# Allegro board Solar BLE Sensor Layout.brd
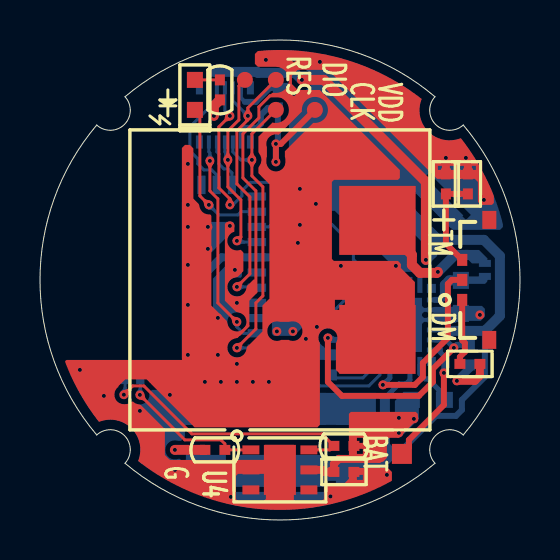
[diagram p0: board, top side]
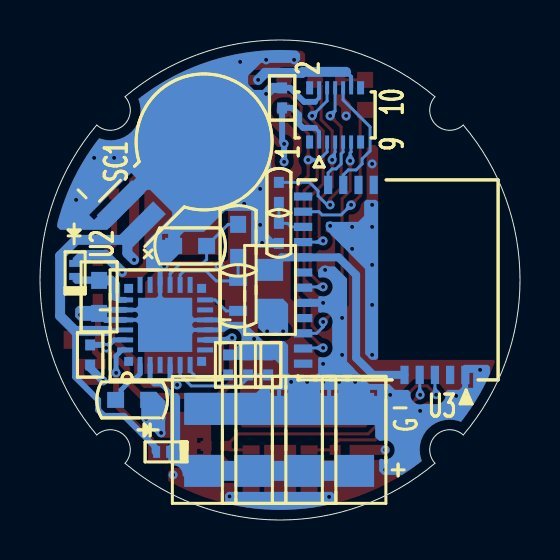
[diagram p1: board, bottom side, seen from below]

Outline 24 x 24 mm; copper layers: TOP, L2, L3, BOTTOM. Coordinates in mm from the lower left corner of the outline.
Outline path: 2.84,4.25 arc(0,12) 2.84,19.75 arc(4.22,19.78) 4.25,21.16 arc(12,24) 19.75,21.16 arc(19.78,19.78) 21.16,19.75 arc(24,12) 21.16,4.25 arc(19.78,4.22) 19.75,2.84 arc(12,0) 4.25,2.84 arc(4.22,4.22) 2.84,4.25

## Placement (name value [footprint] x y rotation side)
C1  10 uF  [CHIP_X1608_2_2]  21.04 11.16 270 bottom
C2  100 uF  [CHIP_X3216_2_1]  15.79 4.01 90 bottom
C3  100 uF  [CHIP_X3216_2_1]  13.29 4.01 90 bottom
C4  100 uF  [CHIP_X3216_2_1]  10.79 4.01 90 bottom
C5  100 uF  [CHIP_X3216_2_1]  8.29 4.01 90 bottom
C6  1.0 uF  [CHIP_X1005_2_2]  21.49 8.26 270 bottom
C7  2.2 nF  [CHIP_X1005_2_2]  12.59 7.76 90 bottom
C8  220 pF  [CHIP_X1005_2_2]  14.59 7.76 90 bottom
C9  220 pF  [CHIP_X1005_2_2]  21.49 7.81 0 top
C10  0.1 uF  [CHIP_X1005_2_2]  15.19 2.41 0 top
C11  0.1 uF  [CHIP_X1005_2_2]  11.89 21.11 90 bottom
C12  0.33 uF  [CHIP_X1005_2_2]  21.39 16.81 90 top
C13  0.1 uF  [CHIP_X1005_2_2]  20.29 16.81 90 top
C14  470 pF  [CHIP_X1005_2_2]  13.59 7.76 90 bottom
CN1  CON10A  [FLT_CONS_10_7PA]  9.24 20.26 180 bottom
D1  1SS417  [FLT_D0806_2_1PB]  22.24 12.51 90 bottom
D2  1SS417  [FLT_D0806_2_1PB]  17.84 3.41 0 bottom
L1  330 Ohm@100MHz  [CHIP_X2125_2_1]  12.49 11.51 270 bottom
LED1  GREEN  [CHIP_LED1608_2_4]  7.74 21.26 270 top
NOREF  -  []  11.99 12.01 0 top
R1  0  [CHIP_R1608_2_2]  19.39 6.01 180 bottom
R2  6.8M  [CHIP_R1608_2_5]  14.09 11.21 270 bottom
R3  5.6M  [CHIP_R1608_2_2]  14.09 13.96 270 bottom
R4  5.6M  [CHIP_R1608_2_2]  16.49 13.71 180 bottom
R5  330  [CHIP_R1005_2_2]  8.99 21.51 90 top
R6  10k  [CHIP_R1005_2_2]  12.05 16.38 270 bottom
R7  100k  [CHIP_R1005_2_2]  12.05 14.33 90 bottom
R8  10k  [CHIP_R1005_2_2]  8.74 3.51 180 top
R9  10k  [CHIP_R1005_2_2]  15.19 3.71 0 top
SC1  200 mF  [FLT_PC_2_8]  15.79 18.91 135 bottom
SW1  SSAJ120100  [FLT_SW_3_4PA]  22.39 12.01 90 top
TP1  1.0mm  [PINF_S1000S_1D]  18.09 3.31 0 top
TP2  1.0mm  [PINF_S1000S_1D]  5.69 3.51 0 top
TP3  0.8mm  [PINF_S0800C_1D]  13.74 20.51 0 top
TP4  0.8mm  [PINF_S0800C_1D]  11.79 22.01 0 top
TP5  0.8mm  [PINF_S0800C_1D]  11.79 20.51 0 top
TP6  0.8mm  [PINF_S0800C_1D]  10.24 22.01 0 top
TP7  1.0mm  [PINF_S1000S_1D]  5.69 3.51 180 bottom
U1  A453  [OTHER_XXX_2_2]  11.99 12.01 180 top
U2  S6AE103A  [QFN_X_24_6TH]  17.74 9.76 180 bottom
U3  CYBLE-022001-00  [OTHER_XXX_21_1]  6.09 12.01 90 bottom
U4  Si7020-A20-GM1  [SON_X_6_11TH]  11.99 2.51 270 top

## Library data of the parts
C1 = GRM188
C2-C5 = GRM31C
C6 C10-C13 = GRM155
C7-C9 C14 = GRM15X
CN1 = DF40C-10DP-0_4V_PA
D1 D2 = 1SS417_FSC_PB
L1 = BLM21PG
LED1 = LTST-C191KGKT
R1 = ERJ3GE
R2 = CRCW0603
R3 R4 = RC0603
R5-R9 = ERJ2G
SC1 = DCK-3R3E204T614-E
SW1 = SSAJ120100_PA
TP1 TP2 TP7 = PINF_S1000S_1D
TP3-TP6 = PINF_S0800C_1D: alternate symbols: (pinf_s0800c_2d)
U1 = A453
U2 = S6AE103A
U3 = CYBLE-022001-00
U4 = SI7020-A20-GM

## Footprints (pads in the part's own frame, mm; a bottom-side part is the same pattern mirrored in y, then rotated)
CHIP_LED1608_2_4
  rect 0.8x0.8 smd: 1(-0.75,0) 2(0.75,0)
CHIP_R1005_2_2
  rect 0.55x0.5 smd: 1(-0.5,0) 2(0.5,0)
CHIP_R1608_2_2
  rect 0.85x0.8 smd: 1(-0.825,0) 2(0.825,0)
CHIP_R1608_2_5
  rect 0.5x0.9 smd: 1(-0.75,0) 2(0.75,0)
CHIP_X1005_2_2
  rect 0.55x0.5 smd: 1(-0.5,0) 2(0.5,0)
CHIP_X1608_2_2
  rect 0.85x0.8 smd: 1(-0.825,0) 2(0.825,0)
CHIP_X2125_2_1
  rect 1.1x1.3 smd: 1(-1,0) 2(1,0)
CHIP_X3216_2_1
  rect 1.6x2 smd: 1(-1.55,0) 2(1.55,0)
FLT_CONS_10_7PA
  rect 0.2x0.66 smd: 1(-0.8,-1.355) 2(-0.8,1.355) 3(-0.4,-1.355) 4(-0.4,1.355) 5(0,-1.355) 6(0,1.355) 7(0.4,-1.355) 8(0.4,1.355) 9(0.8,-1.355) 10(0.8,1.355)
  rect 0.35x0.66 smd: E1(-1.275,-1.355) E2(-1.275,1.355) E3(1.275,-1.355) E4(1.275,1.355)
FLT_D0806_2_1PB
  rect 0.35x0.6 smd: 1(-0.425,0) 2(0.425,0)
FLT_PC_2_8
  rect 2.5x0.9 smd: 1(-5.15,-0.75) 2(-5.15,0.75)
FLT_SW_3_4PA
  rect 0.6x0.51 smd: 1(-1,1.285) 2(1,1.285) 3(0,1.285)
  rect 0.9x0.7 smd: MP1(-3,-0.07) MP2(3,-0.07)
OTHER_XXX_2_2
  rect 3.825x3.45 smd: 1(-4.878,-2.975) 2(-4.878,2.975)
OTHER_XXX_21_1
  rect 0.92x0.41 smd: 1(-4.75,-3.36) 2(-4.75,-2.6) 3(-4.75,-1.84) 4(-4.75,-1.08) 5(-4.75,-0.32) 18(4.75,3.5) 19(4.75,2.74) 20(4.75,1.98) 21(4.75,1.22)
  rect 0.41x0.92 smd: 6(-4.19,4.75) 7(-3.43,4.75) 8(-2.67,4.75) 9(-1.91,4.75) 10(-1.15,4.75) 11(-0.39,4.75) 12(0.37,4.75) 13(1.13,4.75) 14(1.89,4.75) 15(2.65,4.75) 16(3.41,4.75) 17(4.17,4.75)
PINF_S0800C_1D
  round 0.8 smd: 1(0,0)
PINF_S1000S_1D
  rect 1x1 smd: 1(0,0)
QFN_X_24_6TH
  rect 0.25x0.8 smd: 1(-1.25,-2) 2(-0.75,-2) 3(-0.25,-2) 4(0.25,-2) 5(0.75,-2) 6(1.25,-2) 13(1.25,2) 14(0.75,2) 15(0.25,2) 16(-0.25,2) 17(-0.75,2) 18(-1.25,2)
  rect 0.8x0.25 smd: 7(2,-1.25) 8(2,-0.75) 9(2,-0.25) 10(2,0.25) 11(2,0.75) 12(2,1.25) 19(-2,1.25) 20(-2,0.75) 21(-2,0.25) 22(-2,-0.25) 23(-2,-0.75) 24(-2,-1.25)
  rect 2.7x2.7 smd: 25(0,0)
  rect 0.45x0.45 smd: MP1(-1.825,-1.825) MP2(1.825,-1.825) MP3(1.825,1.825) MP4(-1.825,1.825)
SON_X_6_11TH
  rect 0.45x0.85 smd: 1(-1,-1.45) 2(0,-1.45) 3(1,-1.45) 4(1,1.45) 5(0,1.45) 6(-1,1.45)
  rect 2.5x1.6 smd: 7(0,0)

## Nets
GND_SIGNAL: C1.2 C2.2 C3.2 C4.2 C5.2 C6.2 C7.2 C8.2 C9.2 C10.2 C11.2 C12.2 C13.2 C14.2 CN1.2 R4.1 R7.1 SC1.2 TP2.1 TP7.1 U1.2 U2.9 U2.10 U2.16 U2.20 U2.21 U3.1 U3.10 U4.2 U4.7
VDD: C10.1 C11.1 CN1.1 L1.2 R1.2 R5.1 R8.2 R9.2 TP3.1 U4.5
VINT: C6.1 U2.8 U2.23
GPIO: CN1.9 U3.8
SCL: R9.1 U3.3 U4.6
SDA: R8.1 U3.4 U4.1
SWDCLK: CN1.3 TP5.1 U3.7
SWDIO: CN1.4 TP4.1 U3.11
UART_RX: CN1.7 U3.18
UART_TX: CN1.8 U3.19
USB_DET: CN1.6 R6.1
VSTORE2: CN1.10 D2.2 SC1.1 U2.22
XRES: CN1.5 TP6.1 U3.14
N03287: LED1.2 U3.16
N03298: R6.2 R7.2 U3.15
N03372: L1.1 U3.5 U3.13
N05511: D1.2 U1.1
N05549: C1.1 D1.1 U2.19
N05735: R2.2 U2.12
N05739: R2.1 R3.2 U2.14
N05754: R3.1 R4.2 U2.15
N06019: C8.1 U2.6
N06023: C7.1 C14.1 U2.5
N06027: SW1.3 U2.4
N06031: C9.1 SW1.1
N06288: C2.1 C3.1 C4.1 C5.1 D2.1 U2.2
N10908: TP1.1 U2.24
N014810: LED1.1 R5.2
N25629: R1.1 U2.1
N26419: C12.1 C13.1 SW1.2

Pads without a net: CN1 E1 E2 E3 E4; SW1 MP1 MP2; U2 3 7 11 13 17 18 25 MP1 MP2 MP3 MP4; U3 2 6 9 12 17 20 21; U4 3 4

## Via types
v1: diameter 0.45, hole 0.2, TOP to BOTTOM, 73 vias

## Routing (per net, layer and track width the routed paths; a pad name or vN(x,y) marks a point on that pad's centre or on a via; arc(x,y) is an arc through that point)
GND_SIGNAL: length 27.9
  TOP w0.15: v1(8.89,8.26) 8.89,8.71 9.49,9.31 9.99,9.31 10.39,9.71 ; v1(9.84,10.86) 10.24,10.86 10.79,11.41 10.79,16.46 10.14,17.11 10.14,19.31 10.94,20.11 10.94,20.66 11.49,21.21 12.24,21.21
  TOP w0.4: C9.2 21.99,7.21 21.74,6.96 v1(20.84,6.96)
  BOTTOM w0.2: CN1.2 10.04,21.11 10.24,20.91
  BOTTOM w0.25: U2.16 17.99,12.51 v1(17.79,12.71) ; U2.10 14.99,10.01 ; U2.9 14.94,9.51
  BOTTOM w0.3: U2.20 20.87,10.51 21.04,10.33 20.72,10.01 U2.21 ; C11.2 11.49,21.61 10.79,20.91 10.24,20.91
  BOTTOM w0.4: C6.2 21.49,7.61 v1(20.84,6.96) ; 2.73,6.27 2.74,6.26 ; U3.10 v1(9.84,10.86)
  BOTTOM w0.5: C11.2 12.39,21.61 v1(12.69,21.31)
  vias: v1(1.99,7.51) v1(3.19,6.21) v1(4.99,5.46) v1(6.49,6.26) v1(6.74,2.51) v1(7.39,17.81) v1(7.39,15.76) v1(7.39,14.66) v1(7.39,12.76) v1(7.39,10.76) v1(7.39,8.26) v1(8.24,6.91) v1(8.39,14.66) v1(8.39,13.56) v1(8.89,10.11) v1(9.04,6.91) v1(9.49,14.71) v1(9.54,1.16) v1(9.74,12.51) v1(9.84,7.81) v1(9.84,6.91) v1(10.64,6.91) v1(11.29,23.01) v1(11.44,6.91) v1(12.69,23.01) v1(12.89,13.86) v1(12.99,16.56) v1(12.99,14.76) v1(13.29,9.06) v1(13.79,15.81) v1(13.84,9.66) v1(13.99,22.91) v1(14.52,1.18) v1(15.04,12.71) v1(17.34,2.26) v1(20.29,18.11) v1(21.29,18.11) v1(21.99,10.26) v1(22.19,16.01)
VDD: length 16
  TOP w0.3: TP3.1 12.04,18.81 v1(11.79,18.81) v1(11.79,17.91)
  TOP w0.4: 16.99,3.11 16.94,3.05 14.94,3.05 14.69,2.81 C10.1 14.24,2.41 14.14,2.51 U4.5
  TOP w0.5: R8.2 v1(6.74,3.51) ; v1(8.69,20.21) 8.69,20.71 R5.1
  BOTTOM w0.2: 10.24,19.61 10.04,19.41 CN1.1
  BOTTOM w0.3: v1(11.79,17.91) v1(11.79,18.81) 11.89,18.91 C11.1 11.39,20.61 11.04,20.26 11.04,19.81 10.84,19.61 10.24,19.61
  vias: v1(11.84,9.43) v1(12.64,9.43) v1(17.94,5.11) v1(17.94,4.36) v1(18.69,5.06)
VINT: length 13.5
  TOP w0.3: v1(20.69,8.61) 19.64,7.56 19.64,6.91 18.94,6.21 15.09,6.21 14.39,6.91 v1(14.39,9.11)
  BOTTOM w0.25: v1(20.69,8.61) 20.29,9.01 U2.23
  BOTTOM w0.3: v1(20.69,8.61) 20.84,8.76 C6.1 ; U2.8 14.49,9.01 v1(14.39,9.11)
GPIO: length 11
  TOP w0.15: v1(9.84,9.91) 8.89,10.86 8.89,16.06 8.49,16.46 v1(8.49,17.96)
  BOTTOM w0.15: v1(9.84,9.91) 9.84,9.66 10.16,9.34 U3.8 ; v1(8.49,17.96) 8.49,18.36 8.44,18.41 CN1.9
SCL: length 14.3
  TOP w0.15: U4.6 14.49,3.51 R9.1 14.09,4.31 7.59,4.31 5.19,6.71 4.63,6.71 v1(4.19,6.27)
  BOTTOM w0.15: v1(4.19,6.27) 4.25,6.61 U3.3
SDA: length 7.9
  TOP w0.15: U4.1 R8.1 9.24,3.81 9.04,4.01 7.24,4.01 v1(4.99,6.26)
  BOTTOM w0.15: U3.4 5.01,6.61 v1(4.99,6.26)
SWDCLK: length 15.8
  TOP w0.15: v1(9.84,8.61) 10.79,9.56 10.79,10.86 11.14,11.21 11.14,16.66 10.59,17.21 v1(10.59,18.01) 10.59,19.31 TP5.1
  BOTTOM w0.15: U3.7 10.52,8.58 10.49,8.61 v1(9.84,8.61) ; v1(10.59,18.01) 10.04,18.01 9.64,18.41 CN1.3
SWDIO: length 14.4
  TOP w0.15: TP4.1 10.39,20.61 v1(10.39,20.21) 10.39,20.01 9.84,19.46 9.84,16.81 10.49,16.16 10.49,12.31 v1(9.84,11.66)
  BOTTOM w0.15: CN1.4 9.64,20.96 v1(10.39,20.21) ; v1(9.84,11.66) 10.59,11.66 10.63,11.62 U3.11
UART_RX: length 2.6
  BOTTOM w0.15: CN1.7 8.84,18.41 8.94,18.31 8.94,17.81 9.19,17.56 9.39,17.56 9.59,17.36 U3.18
UART_TX: length 6.2
  BOTTOM w0.15: U3.19 8.83,17.26 8.58,17.51 8.19,17.51 7.89,17.81 7.89,18.06 7.49,18.46 7.49,19.66 8.84,21.01 CN1.8
USB_DET: length 9.6
  TOP w0.15: v1(9.49,15.76) 9.49,16.06 8.94,16.61 8.94,19.66 v1(9.49,20.21)
  BOTTOM w0.15: v1(9.49,15.76) 9.64,15.76 10.09,16.21 10.09,16.46 10.52,16.88 R6.1 ; v1(9.49,20.21) 9.24,20.46 CN1.6
VSTORE2: length 38.4
  TOP w0.5: v1(13.09,22.01) 14.19,22.01 19.29,16.91 v1(19.29,13.01)
  BOTTOM w0.15: 20.59,9.46 20.54,9.51 U2.22
  BOTTOM w0.2: 8.69,22.41 8.44,22.16 CN1.10
  BOTTOM w0.3: 18.27,3.41 18.27,3.68 19.79,5.21 20.79,5.21 21.09,5.51 21.09,6.01 22.24,7.16 22.24,9.46
  BOTTOM w0.5: SC1.1 19.63,14.01 ; 19.63,14.01 22.19,14.01 22.99,13.21 22.99,10.21 22.24,9.46 20.59,9.46 ; 19.63,14.01 19.63,13.34 v1(19.29,13.01) ; v1(13.09,22.01) 12.74,22.36 10.89,22.36 10.84,22.41 8.69,22.41
XRES: length 10.7
  TOP w0.15: v1(9.84,13.96) 10.04,14.16 10.04,16.01 9.39,16.66 v1(9.39,18.01) 9.39,19.46 9.94,20.01 9.94,21.71 TP6.1
  BOTTOM w0.15: v1(9.39,18.01) 9.24,18.41 CN1.5 ; U3.14 10.19,13.9 v1(9.84,13.96)
N03287: length 7.7
  TOP w0.15: LED1.2 7.99,20.26 7.99,16.21 v1(8.44,15.76)
  BOTTOM w0.15: U3.16 10.05,15.42 9.89,15.26 8.94,15.26 v1(8.44,15.76)
N03298: length 2.3
  BOTTOM w0.15: U3.15 11.44,14.66 11.62,14.83 R7.2 R6.2
N03372: length 11.9
  BOTTOM w0.4: U3.5 7.34,7.26 8.19,8.11 8.19,12.26 9.07,13.14 U3.13 11.91,13.14 L1.1
N05511: length 6.3
  TOP w0.5: v1(19.89,12.41) 19.84,12.36 18.99,12.36 18.59,12.76 18.59,13.26 16.87,14.98
  BOTTOM w0.5: v1(19.89,12.41) 20.74,13.26 21.39,13.26
N05549: length 2
  BOTTOM w0.3: U2.19 20.04,11.01 20.24,11.21
  BOTTOM w0.5: 20.24,11.21 20.24,11.76 20.47,11.98 21.04,11.98
N05735: length 1.9
  BOTTOM w0.15: U2.12 15.24,11.01 14.69,10.46 R2.2
N05739: length 4.9
  BOTTOM w0.15: U2.14 16.99,12.26 16.79,12.46 15.69,12.46 15.19,11.96 R2.1 R3.2
N05754: length 5.4
  BOTTOM w0.15: R3.1 14.59,14.78 R4.2 15.67,13.03 15.89,12.81 16.99,12.81 17.49,12.3 U2.15
N06019: length 2.4
  BOTTOM w0.15: C8.1 14.79,7.11 16.14,7.11 16.49,7.46 U2.6
N06023: length 5.4
  BOTTOM w0.15: U2.5 16.99,7.26 16.44,6.71 13.99,6.71 13.59,7.11 C14.1 C7.1
N06027: length 9.3
  TOP w0.3: v1(17.14,6.76) 18.74,6.76 19.14,7.16 19.14,7.86 20.39,9.11 20.39,11.81 20.59,12.01 SW1.3
  BOTTOM w0.25: U2.4 17.49,7.11 v1(17.14,6.76)
N06031: length 3.4
  TOP w0.3: C9.1 20.99,8.16 21.24,8.41 21.24,8.86 21.11,8.99 SW1.1
N06288: length 12.2
  BOTTOM w0.25: 17.24,6.11 17.94,6.81 18.29,6.81 18.5,7.01 18.5,7.75 U2.2
  BOTTOM w0.5: 17.24,3.76 17.24,6.11
  BOTTOM w1: C2.1 C3.1 C4.1 C5.1
N10908: length 6.3
  TOP w0.3: TP1.1 18.44,3.66 18.44,4.01 20.19,5.76 v1(20.19,7.36)
  BOTTOM w0.25: U2.24 19.89,8.51 20.19,8.21 v1(20.19,7.36)
N014810: length 1.2
  TOP w0.15: LED1.1 R5.2
N25629: length 2.3
  BOTTOM w0.25: U2.1 18.99,7.31 19.24,7.06 19.39,7.06 19.94,6.51 19.94,6.28 R1.1
N26419: length 4.7
  TOP w0.3: C12.1 C13.1 20.29,13.82 SW1.2

## Copper pours and planes (outline as drawn; the poured copper is in the pictures)
GND_SIGNAL on TOP (solid shape): 10.89,23.45 11.04,23.46 11.34,23.48 11.65,23.5 11.96,23.5 12.26,23.5 12.57,23.49 12.88,23.47 13.03,23.45 13.09,23.45 13.24,23.43 13.53,23.4 13.83,23.35 14.12,23.3 14.41,23.24 14.7,23.17 14.99,23.1 15.28,23.02 15.56,22.93 15.84,22.83 16.12,22.73 16.4,22.62 16.67,22.5 16.94,22.38 17.21,22.25 17.47,22.11 17.73,21.96 17.99,21.81 18.24,21.65 18.49,21.49 18.73,21.32 18.97,21.14 19.08,21.05 19.06,21 19.03,20.89 19.01,20.79 18.99,20.68 18.98,20.57 18.97,20.46 18.98,20.35 18.99,20.25 19.01,20.14 19.04,20.03 19.08,19.93 19.12,19.83 19.17,19.73 19.23,19.64 19.3,19.55 19.37,19.47 19.44,19.39 19.53,19.32 19.61,19.26 19.71,19.2 19.8,19.14 19.9,19.1 20,19.06 20.11,19.03 20.21,19.01 20.32,18.99 20.43,18.98 20.54,18.99 20.65,18.99 20.77,19.01 20.88,19.04 20.99,19.07 21.04,19.09 21.13,18.97 21.32,18.73 21.49,18.48 21.66,18.23 21.82,17.97 21.97,17.71 22.12,17.44 22.26,17.17 22.39,16.9 22.52,16.62 22.64,16.34 22.69,16.2 22.69,15.86 22.59,15.76 22.04,15.76 21.89,15.91 21.89,16.91 21.74,17.06 19.85,17.06 19.4,17.51 21.79,17.51 21.79,17.71 21.59,17.71 21.59,17.51 21.19,17.51 21.19,17.71 20.99,17.71 20.99,17.51 20.69,17.51 20.69,17.71 20.49,17.71 20.49,17.51 20.09,17.51 20.09,17.71 19.89,17.71 19.89,17.51 19.4,17.51 14.4,22.51 12.89,22.51 12.59,22.21 12.59,21.8 12.89,21.5 13.99,21.5 17.99,17.5 17.99,17.11 17.89,17.01 14.69,17.01 14.59,16.91 14.59,13.06 14.69,12.96 17.89,12.96 18.04,12.81 18.04,12.6 18.74,11.9 18.74,7.36 14.94,7.36 14.79,7.51 14.79,8.85 14.82,8.89 14.84,8.95 14.86,9.01 14.87,9.07 14.87,9.13 14.86,9.19 14.85,9.25 14.82,9.31 14.79,9.37 14.75,9.42 14.71,9.46 14.66,9.5 14.61,9.53 14.55,9.56 14.49,9.57 14.43,9.58 14.36,9.58 14.3,9.57 14.24,9.56 14.18,9.53 14.13,9.5 14.08,9.46 14.04,9.42 14,9.37 13.97,9.31 13.94,9.26 13.93,9.19 13.92,9.13 13.92,9.07 13.93,9.01 13.95,8.95 13.97,8.89 13.99,8.85 13.99,6.74 13.99,4.76 13.87,4.63 7.73,4.63 5.33,7.03 4.26,7.03 3.92,6.69 3.92,6.65 3.85,6.59 3.81,6.55 3.78,6.49 3.75,6.44 3.73,6.38 3.72,6.32 3.72,6.26 3.72,6.2 3.74,6.14 3.76,6.08 3.78,6.02 3.82,5.97 3.86,5.93 3.9,5.89 3.96,5.85 4.01,5.83 4.07,5.81 4.13,5.79 4.19,5.79 4.25,5.79 4.31,5.79 4.37,5.81 4.42,5.82 4.48,5.85 4.53,5.88 4.59,5.92 4.62,5.92 4.64,5.92 4.7,5.88 4.75,5.85 4.8,5.82 4.86,5.8 5.04,5.75 6.24,4.55 6.24,3.26 6.49,3.01 8.45,3 11.19,3.01 11.24,3.06 11.24,3.76 12.69,3.76 12.69,1.01 12.74,0.96 14.09,0.96 14.19,1.06 14.19,1.76 14.29,1.86 15.24,1.86 15.39,2.01 16.14,2.01 16.14,2.26 15.84,2.26 15.84,2.01 15.39,2.01 15.44,2.06 15.44,2.6 17.13,2.6 17.39,2.61 17.59,2.41 17.59,1.96 17.46,1.89 17.19,1.74 16.91,1.61 16.63,1.48 16.35,1.36 16.07,1.25 15.78,1.15 15.49,1.05 15.19,0.96 14.9,0.88 14.6,0.8 14.3,0.74 14,0.68 13.7,0.63 13.39,0.59 13.09,0.56 12.78,0.53 12.48,0.51 12.17,0.51 11.87,0.51 11.56,0.51 11.25,0.53 10.95,0.55 10.64,0.58 10.34,0.62 10.04,0.67 9.73,0.73 9.43,0.79 9.14,0.87 8.84,0.95 8.55,1.03 8.26,1.13 7.97,1.23 7.68,1.34 7.4,1.46 7.12,1.59 6.84,1.72 6.57,1.86 6.3,2.01 6.04,2.17 5.98,2.21 9.79,2.21 9.79,1.06 9.89,0.96 11.19,0.96 11.29,1.06 11.29,2.21 11.19,2.31 9.89,2.31 9.79,2.21 5.98,2.21 5.78,2.33 5.52,2.5 5.27,2.67 5.03,2.86 4.9,2.95 4.92,3 4.96,3.11 4.98,3.21 5,3.32 5.01,3.43 5.01,3.54 5.01,3.65 4.99,3.76 4.97,3.87 4.94,3.97 4.91,4.08 4.86,4.18 4.81,4.27 4.75,4.37 4.69,4.45 4.61,4.54 4.54,4.61 4.45,4.69 4.36,4.75 4.27,4.81 4.17,4.86 4.07,4.91 3.97,4.94 3.87,4.97 3.76,5 3.65,5.01 3.54,5.02 3.43,5.01 3.32,5 3.21,4.99 3.11,4.96 3,4.93 2.95,4.91 2.85,5.03 2.67,5.28 2.49,5.54 2.31,5.8 2.15,6.07 1.99,6.34 1.84,6.61 1.7,6.89 1.56,7.17 1.43,7.46 1.31,7.75 1.26,7.9 1.26,7.94 1.27,7.96 1.29,7.98 1.32,8 1.36,8 7.09,8 7.09,18.61 7.24,18.76 7.49,18.76 7.67,18.58 7.67,16.07 7.94,15.8 7.99,15.61 8.02,15.55 8.05,15.49 8.12,15.41 8.16,15.37 8.21,15.34 8.26,15.32 8.32,15.3 8.38,15.28 8.44,15.28 8.5,15.27 8.53,15.26 8.55,15.24 8.56,15.22 8.57,15.18 8.57,10.72 9.34,9.95 9.39,9.76 9.41,9.71 9.44,9.65 9.48,9.6 9.52,9.56 9.56,9.52 9.62,9.49 9.67,9.46 9.73,9.44 9.79,9.43 9.85,9.43 9.91,9.43 9.97,9.45 10.03,9.47 10.08,9.49 10.13,9.53 10.18,9.56 10.22,9.61 10.31,9.99 10.3,10.06 10.27,10.12 10.24,10.17 10.2,10.22 10.15,10.27 10.1,10.31 10.05,10.34 9.99,10.36 9.8,10.41 9.24,10.96 9.24,14.81 9.34,14.91 9.59,14.91 9.72,14.78 9.72,14.41 9.66,14.39 9.61,14.37 9.56,14.33 9.51,14.3 9.47,14.25 9.44,14.2 9.41,14.15 9.39,14.09 9.37,14.03 9.37,13.97 9.37,13.91 9.38,13.85 9.4,13.79 9.42,13.74 9.45,13.69 9.49,13.64 9.53,13.6 9.58,13.56 9.63,13.53 9.69,13.5 9.76,13.49 9.82,13.48 9.89,13.48 9.96,13.49 10,13.51 10.04,13.51 10.17,13.38 10.17,12.44 9.89,12.16 9.71,12.11 9.65,12.09 9.59,12.06 9.54,12.02 9.5,11.98 9.46,11.93 9.42,11.88 9.4,11.82 9.38,11.76 9.37,11.7 9.37,11.64 9.37,11.58 9.39,11.52 9.41,11.46 9.44,11.4 9.48,11.35 9.52,11.31 9.57,11.27 9.62,11.24 9.68,11.21 9.73,11.19 9.8,11.18 9.86,11.18 9.92,11.19 9.98,11.2 10.04,11.22 10.09,11.25 10.14,11.29 10.19,11.33 10.23,11.38 10.27,11.44 10.3,11.51 10.35,11.7 10.65,12 10.66,12.01 10.69,12.02 10.71,12.03 10.74,12.03 10.77,12.01 10.79,12 10.81,11.97 10.82,11.94 10.82,11.93 10.82,11.34 10.47,10.99 10.47,9.69 9.89,9.11 9.71,9.06 9.65,9.04 9.59,9.01 9.54,8.97 9.49,8.93 9.45,8.88 9.42,8.82 9.4,8.77 9.38,8.7 9.37,8.64 9.37,8.58 9.38,8.52 9.39,8.46 9.42,8.4 9.45,8.34 9.48,8.29 9.53,8.25 9.58,8.21 9.63,8.18 9.69,8.15 9.75,8.14 9.81,8.13 9.87,8.13 9.94,8.14 10,8.15 10.06,8.18 10.11,8.21 10.16,8.25 10.2,8.29 10.24,8.34 10.35,8.65 11.11,9.41 11.37,9.41 11.38,9.35 11.39,9.29 11.41,9.23 11.44,9.18 11.47,9.13 11.52,9.09 11.56,9.05 11.62,9.01 11.67,8.99 11.73,8.97 11.79,8.96 11.85,8.95 11.91,8.96 11.97,8.97 12.03,8.99 12.06,9.01 12.43,9.01 12.46,8.99 12.52,8.97 12.58,8.96 12.64,8.95 12.7,8.96 12.76,8.97 12.82,8.99 12.87,9.01 12.93,9.05 12.97,9.09 13.01,9.13 13.05,9.18 13.08,9.23 13.1,9.29 13.11,9.35 13.12,9.41 13.12,9.47 13.11,9.53 13.1,9.59 13.08,9.65 13.05,9.7 13.02,9.75 12.98,9.8 12.93,9.84 12.88,9.87 12.83,9.89 12.77,9.91 12.71,9.93 12.65,9.93 12.59,9.93 12.53,9.93 12.48,9.92 12.43,9.91 12,9.91 11.96,9.92 11.9,9.93 11.84,9.93 11.78,9.93 11.72,9.91 11.66,9.9 11.61,9.87 11.56,9.84 11.51,9.8 11.47,9.75 11.44,9.7 11.41,9.65 11.39,9.59 11.38,9.53 11.37,9.47 11.37,9.41 11.11,9.41 11.12,9.42 11.12,10.51 15.24,10.51 15.24,11.01 14.74,11.01 14.74,10.51 11.12,10.51 11.12,10.72 11.47,11.07 11.47,16.79 10.92,17.34 10.92,17.62 11.02,17.79 11.04,17.85 11.06,17.91 11.07,17.97 11.07,18.04 11.06,18.1 11.04,18.16 11.02,18.22 10.92,18.39 10.92,18.82 11.32,18.82 11.32,18.75 11.33,18.69 11.34,18.64 11.34,18.16 11.33,18.12 11.32,18.05 11.32,17.99 11.32,17.96 11.32,17.92 11.32,17.86 11.33,17.8 11.35,17.74 11.37,17.69 11.4,17.63 11.44,17.59 11.48,17.54 11.53,17.51 11.59,17.48 11.64,17.45 11.7,17.44 11.76,17.43 11.83,17.43 11.89,17.44 11.95,17.45 12,17.48 12.06,17.51 12.1,17.54 12.15,17.59 12.19,17.64 12.22,17.69 12.24,17.74 12.26,17.8 12.27,17.86 12.27,17.92 12.27,17.96 12.27,17.99 12.27,18.05 12.26,18.12 12.24,18.17 12.24,18.44 13.66,19.86 13.72,19.85 13.8,19.86 13.87,19.87 13.94,19.88 14.01,19.91 14.07,19.94 14.13,19.98 14.19,20.03 14.24,20.08 14.28,20.14 14.32,20.2 14.35,20.26 14.37,20.33 14.39,20.4 14.39,20.47 14.39,20.55 14.39,20.62 14.37,20.69 14.34,20.76 14.31,20.82 14.27,20.88 14.23,20.94 14.18,20.99 14.12,21.04 14.06,21.07 14,21.11 13.93,21.13 13.86,21.15 13.79,21.15 13.71,21.16 13.64,21.15 13.57,21.13 13.5,21.11 13.44,21.08 13.38,21.04 13.32,21 13.27,20.95 13.22,20.89 13.18,20.83 13.15,20.77 13.12,20.7 13.11,20.63 13.1,20.56 13.09,20.48 13.1,20.43 11.93,19.26 11.88,19.27 11.81,19.28 11.75,19.28 11.69,19.27 11.63,19.25 11.57,19.23 11.52,19.19 11.47,19.15 11.43,19.11 11.39,19.06 11.36,19 11.34,18.94 11.32,18.88 11.32,18.82 10.92,18.82 10.92,19.17 11.63,19.88 11.69,19.86 11.76,19.86 11.83,19.86 11.9,19.86 11.97,19.88 12.03,19.9 12.1,19.93 12.16,19.96 12.21,20.01 12.26,20.06 12.31,20.11 12.35,20.17 12.38,20.23 12.41,20.29 12.43,20.36 12.44,20.43 12.45,20.5 12.44,20.57 12.43,20.63 12.42,20.69 12.35,20.84 12.31,20.9 12.27,20.95 12.22,21 12.17,21.04 12.11,21.07 12.05,21.1 11.92,21.14 11.86,21.15 11.8,21.16 11.5,21.16 11.48,21.18 11.48,21.2 11.48,21.21 11.6,21.36 11.8,21.35 11.88,21.36 11.95,21.37 12.02,21.39 12.08,21.42 12.15,21.46 12.21,21.5 12.26,21.55 12.31,21.6 12.35,21.66 12.38,21.73 12.41,21.79 12.43,21.86 12.44,21.93 12.45,22.01 12.44,22.08 12.43,22.15 12.41,22.22 12.38,22.29 12.35,22.35 12.3,22.41 12.26,22.46 12.2,22.51 12.14,22.55 12.08,22.59 12.01,22.62 11.94,22.64 11.88,22.65 11.82,22.66 10.89,22.66 10.74,22.81 10.74,23.31
GND_SIGNAL on BOTTOM (solid shape): 22.24,10.56 22.24,10.16 22.04,9.96 20.64,9.96 20.64,10.71 22.09,10.71
GND_SIGNAL on BOTTOM (solid shape): 7.79,15.91 7.79,15.21 8.09,14.91 9.64,14.91 9.69,14.86 9.69,14.51 9.6,14.42 9.51,14.34 9.43,14.24 7.74,12.56 7.74,8.31 7.44,8.01 7.19,8.01 7.09,8.1 7.09,14.5 7.09,15.91 7.19,16.01 7.69,16.01
GND_SIGNAL on BOTTOM (solid shape): 18.09,11.21 18.19,11.11 19.09,11.11 19.09,10.71 19.19,10.61 20.09,10.61 20.09,10.41 19.19,10.41 19.09,10.31 19.09,10.21 19.19,10.11 20.09,10.11 20.09,9.91 19.19,9.91 19.09,9.81 19.09,8.41 16.39,8.41 16.39,9.31 16.29,9.41 15.39,9.41 15.39,9.61 16.29,9.61 16.39,9.71 16.39,9.81 16.29,9.91 15.39,9.91 15.39,10.11 16.29,10.11 16.39,10.21 16.39,11.11 17.79,11.11 17.89,11.21 17.89,12.11 18.09,12.11
GND_SIGNAL on BOTTOM (solid shape): 11.16,23.47 11.31,23.48 11.63,23.49 11.94,23.5 12.25,23.5 12.56,23.49 12.88,23.47 13.03,23.45 13.24,23.43 13.53,23.4 13.83,23.35 14.12,23.3 14.41,23.24 14.7,23.17 14.99,23.1 15.28,23.02 15.56,22.93 15.84,22.83 16.12,22.73 16.4,22.62 16.67,22.5 16.94,22.38 17.21,22.25 17.47,22.11 17.73,21.96 17.99,21.81 18.24,21.65 18.49,21.49 18.73,21.32 18.97,21.14 19.08,21.05 19.06,21 19.03,20.89 19.01,20.79 18.99,20.68 18.98,20.57 18.97,20.46 18.98,20.35 18.99,20.25 19.01,20.14 19.04,20.03 19.08,19.93 19.12,19.83 19.17,19.74 19.23,19.64 19.3,19.55 19.37,19.47 19.44,19.39 19.53,19.32 19.61,19.26 19.7,19.2 19.8,19.14 19.9,19.1 20,19.06 20.11,19.03 20.21,19.01 20.32,18.99 20.43,18.98 20.54,18.99 20.64,18.99 20.72,19 20.81,19.02 20.9,19.04 21.04,19.09 21.13,18.97 21.31,18.73 21.49,18.49 21.65,18.24 21.81,17.98 21.96,17.72 22.11,17.46 22.25,17.19 22.38,16.92 22.51,16.65 22.63,16.37 22.74,16.09 22.84,15.81 22.94,15.53 23.02,15.24 23.11,14.95 23.14,14.79 23.14,14.66 22.99,14.51 20.64,14.51 18.64,16.51 18.49,16.51 17.39,15.41 17.39,15.21 18.69,13.91 18.69,12.51 18.59,12.41 17.94,12.41 16.99,13.35 16.99,14.01 17.89,14.01 17.89,14.31 17.59,14.31 17.59,14.01 16.99,14.01 16.99,14.21 16.79,14.41 15.79,14.41 14.74,15.46 13.44,15.46 13.44,13.81 13.24,13.61 11.89,13.61 11.84,13.66 11.84,14.06 12.34,14.06 12.59,14.31 12.59,17.11 19.19,17.11 21.29,15.01 21.54,15.26 19.44,17.36 19.19,17.11 12.59,17.11 12.59,17.41 12.44,17.56 12.44,21.36 12.59,21.5 13.3,21.5 13.59,21.8 13.59,22.21 12.95,22.86 11.14,22.86 10.99,23.01 10.99,23.31
GND_SIGNAL on BOTTOM (solid shape): 10.09,12.51 10.09,12.21 10.09,12.2 10.08,12.17 10.07,12.14 10.04,12.12 10.01,12.11 9.98,12.11 9.94,12.12 9.88,12.13 9.81,12.13 9.75,12.12 9.69,12.11 9.63,12.08 9.58,12.05 9.53,12.01 9.49,11.97 9.45,11.92 9.42,11.87 9.39,11.81 9.38,11.75 9.37,11.69 9.37,11.62 9.38,11.56 9.39,11.5 9.42,11.44 9.45,11.39 9.49,11.34 9.53,11.3 9.58,11.26 9.63,11.23 9.69,11.2 9.75,11.19 9.81,11.18 9.88,11.18 9.94,11.19 9.98,11.2 10.01,11.2 10.04,11.19 10.07,11.17 10.08,11.14 10.09,11.11 10.09,11.1 10.09,10.46 10.09,10.45 10.08,10.42 10.07,10.39 10.04,10.37 10.01,10.36 9.98,10.36 9.94,10.37 9.88,10.38 9.82,10.38 9.76,10.37 9.7,10.36 9.64,10.34 9.59,10.31 9.54,10.27 9.5,10.23 9.46,10.18 9.43,10.13 9.4,10.08 9.38,10.02 9.37,9.96 9.37,9.9 9.37,9.84 9.39,9.78 9.39,9.75 9.39,8.76 9.39,8.73 9.37,8.67 9.37,8.61 9.37,8.55 9.38,8.49 9.4,8.43 9.43,8.38 9.46,8.33 9.5,8.28 9.54,8.24 9.59,8.2 9.64,8.17 9.7,8.15 9.76,8.14 9.82,8.13 9.88,8.13 9.94,8.14 9.98,8.15 10.01,8.15 10.04,8.14 10.07,8.12 10.08,8.09 10.09,8.06 10.09,8.05 10.09,7.36 10.19,7.26 11.49,7.26 11.59,7.36 11.59,8.76 11.79,8.95 12.8,8.95 12.84,8.96 13.79,9.91 14.69,9.91 14.89,10.11 15.09,10.11 15.09,9.46 15.04,9.41 14.79,9.41 14.73,9.44 14.71,9.46 14.66,9.5 14.61,9.53 14.56,9.55 14.51,9.57 14.46,9.58 14.4,9.58 14.34,9.58 14.28,9.57 14.22,9.55 14.17,9.52 14.11,9.49 14.07,9.45 14.02,9.4 13.99,9.35 13.96,9.3 13.94,9.24 13.92,9.18 13.92,9.11 13.92,9.05 13.93,8.99 13.95,8.93 13.98,8.87 14.01,8.82 14.06,8.77 14.11,8.72 14.16,8.69 14.34,8.51 14.84,8.51 14.84,8.01 12.24,8.01 12.04,7.81 12.04,7.16 11.99,7.11 11.99,6.88 12.14,6.73 12.82,6.73 13.19,6.36 16.64,6.36 16.64,4.76 14.79,4.76 14.29,4.76 12.29,4.76 11.79,4.76 9.79,4.76 9.29,4.76 7.29,4.76 7.24,4.71 7.24,4.16 7.04,3.96 6.91,3.96 6.86,3.97 6.8,3.98 6.73,3.98 6.67,3.98 6.61,3.96 6.55,3.94 6.5,3.91 6.45,3.88 6.4,3.83 6.36,3.79 6.33,3.73 6.3,3.68 6.28,3.62 6.27,3.56 6.27,3.49 6.27,3.43 6.29,3.37 6.31,3.31 6.34,3.26 6.37,3.21 6.42,3.16 6.46,3.12 6.52,3.09 6.57,3.06 6.63,3.04 6.7,3.03 6.76,3.03 6.82,3.04 6.88,3.05 6.95,3.07 6.98,3.06 7,3.05 7.02,3.03 7.04,3.01 7.04,2.97 7.04,2.46 6.84,2.26 5.9,2.26 5.77,2.34 5.52,2.5 5.27,2.68 5.02,2.86 4.9,2.95 4.92,3 4.96,3.11 4.98,3.21 5,3.32 5.01,3.43 5.01,3.54 5.01,3.65 4.99,3.76 4.97,3.87 4.94,3.97 4.91,4.08 4.86,4.18 4.81,4.27 4.75,4.37 4.69,4.45 4.61,4.54 4.54,4.61 4.45,4.69 4.36,4.75 4.27,4.81 4.17,4.86 4.07,4.91 3.97,4.94 3.87,4.97 3.76,5 3.65,5.01 3.54,5.02 3.43,5.01 3.32,5 3.21,4.99 3.11,4.96 3,4.93 2.95,4.91 2.85,5.03 2.67,5.28 2.49,5.54 2.31,5.8 2.15,6.07 1.99,6.34 1.84,6.61 2.59,6.61 2.59,7.36 2.34,7.36 2.34,6.61 1.84,6.61 1.84,6.62 1.69,6.9 1.56,7.18 1.49,7.32 1.49,7.66 1.59,7.76 2.79,7.76 2.89,7.66 2.89,6.66 3.04,6.51 3.62,6.51 3.72,6.41 3.72,6.25 3.72,6.19 3.74,6.13 3.76,6.08 3.79,6.02 3.82,5.97 3.86,5.93 3.91,5.89 3.96,5.85 4.01,5.83 4.07,5.81 4.13,5.79 4.19,5.79 4.27,5.79 4.33,5.8 4.36,5.81 4.83,5.81 4.88,5.79 4.94,5.78 5,5.78 5.06,5.78 5.12,5.8 5.18,5.82 5.24,5.85 5.29,5.88 5.33,5.92 5.37,5.97 5.41,6.02 5.43,6.07 5.45,6.13 5.47,6.19 5.47,6.21 12.49,6.21 12.49,6.51 12.14,6.51 12.14,6.21 11.94,6.21 11.94,6.51 11.59,6.51 11.59,6.21 9.99,6.21 9.99,6.51 9.64,6.51 9.64,6.21 9.44,6.21 9.44,6.51 9.09,6.51 9.09,6.21 7.49,6.21 7.49,6.51 7.14,6.51 7.14,6.21 5.47,6.21 5.47,6.25 5.47,6.31 5.46,6.37 5.59,6.51 6.24,6.51 6.54,6.8 7.54,6.81 8.29,7.56 8.29,7.57 8.64,7.92 8.64,12.07 9.26,12.68 9.91,12.68
GND_SIGNAL on L3 (solid shape): 7.14,22.38 7.28,22.44 7.56,22.56 7.84,22.67 8.12,22.78 8.4,22.88 8.69,22.97 8.98,23.05 9.27,23.13 9.56,23.19 9.86,23.25 10.16,23.31 10.45,23.35 10.75,23.39 11.05,23.42 11.35,23.44 11.65,23.45 11.95,23.46 12.25,23.45 12.56,23.44 12.86,23.42 13.16,23.4 13.45,23.36 13.75,23.32 14.05,23.27 14.35,23.21 14.64,23.15 14.93,23.07 15.22,22.99 15.51,22.9 15.79,22.81 16.08,22.7 16.36,22.59 16.63,22.47 16.91,22.35 17.18,22.22 17.44,22.08 17.71,21.93 17.97,21.78 18.22,21.61 18.47,21.45 18.72,21.27 18.96,21.09 19.08,21 19.06,20.95 19.03,20.84 19.01,20.74 18.99,20.63 18.98,20.52 18.99,20.41 19,20.3 19.01,20.19 19.04,20.08 19.07,19.98 19.11,19.88 19.16,19.78 19.22,19.68 19.28,19.59 19.35,19.51 19.42,19.42 19.5,19.35 19.59,19.28 19.68,19.22 19.78,19.16 19.87,19.11 19.98,19.07 20.08,19.04 20.19,19.01 20.3,19 20.41,18.99 20.52,18.99 20.63,18.99 20.73,19.01 20.84,19.03 20.95,19.06 21,19.08 21.09,18.96 21.28,18.71 21.45,18.46 21.62,18.21 21.78,17.95 21.94,17.69 22.08,17.42 22.22,17.15 22.36,16.87 22.48,16.6 22.6,16.31 22.71,16.03 22.82,15.74 22.91,15.45 23,15.16 23.08,14.87 23.15,14.57 23.22,14.27 23.27,13.97 23.32,13.67 23.36,13.37 23.4,13.07 23.42,12.76 23.44,12.46 23.44,12.15 23.44,11.85 23.44,11.54 23.42,11.24 23.39,10.93 23.36,10.63 23.32,10.33 23.27,10.03 23.22,9.73 23.15,9.43 23.08,9.13 23,8.84 22.91,8.55 22.81,8.26 22.71,7.97 22.6,7.69 22.48,7.41 22.35,7.13 22.22,6.85 22.08,6.58 21.93,6.32 21.78,6.05 21.61,5.79 21.45,5.54 21.27,5.29 21.09,5.05 20.99,4.93 20.94,4.94 20.84,4.97 20.73,5 20.62,5.01 20.51,5.02 20.4,5.01 20.29,5 20.18,4.99 20.08,4.96 19.97,4.93 19.87,4.88 19.77,4.84 19.68,4.78 19.59,4.72 19.5,4.65 19.42,4.58 19.35,4.5 19.28,4.41 19.22,4.32 19.16,4.23 19.12,4.13 19.07,4.03 19.04,3.92 19.02,3.82 19,3.71 18.99,3.6 18.98,3.49 18.99,3.38 19,3.27 19.03,3.16 19.06,3.06 19.07,3.01 18.95,2.91 18.71,2.73 18.46,2.55 18.21,2.39 17.95,2.22 17.68,2.07 17.42,1.92 17.15,1.78 16.87,1.65 16.59,1.52 16.31,1.4 16.03,1.29 15.74,1.19 15.45,1.09 15.16,1 14.87,0.92 14.57,0.85 14.27,0.78 13.97,0.73 13.67,0.68 13.37,0.64 13.07,0.6 12.76,0.58 12.46,0.56 12.15,0.56 11.85,0.56 11.54,0.56 11.24,0.58 10.93,0.6 10.63,0.64 10.33,0.68 10.03,0.72 9.73,0.78 9.43,0.85 9.13,0.92 8.84,1 8.55,1.09 8.26,1.18 7.97,1.29 7.68,1.4 7.4,1.52 7.13,1.64 6.85,1.77 6.58,1.92 6.31,2.06 6.05,2.22 5.79,2.38 5.54,2.55 5.29,2.72 5.04,2.91 4.92,3 4.94,3.05 4.97,3.16 4.99,3.27 5.01,3.37 5.01,3.48 5.01,3.59 5,3.7 4.99,3.81 4.96,3.92 4.93,4.02 4.88,4.13 4.84,4.23 4.78,4.32 4.76,4.35 17.47,4.35 17.47,4.29 17.48,4.23 17.5,4.18 17.53,4.12 17.56,4.07 17.6,4.02 17.65,3.98 17.7,3.95 17.76,3.92 17.81,3.9 17.87,3.88 17.93,3.88 18,3.88 18.06,3.89 18.11,3.91 18.17,3.94 18.22,3.97 18.27,4.01 18.31,4.05 18.35,4.1 18.38,4.16 18.4,4.21 18.41,4.27 18.42,4.34 18.42,4.4 18.41,4.46 18.4,4.53 18.4,4.55 18.42,4.58 18.44,4.6 18.46,4.61 18.49,4.61 18.56,4.6 18.62,4.59 18.68,4.58 18.74,4.58 18.8,4.59 18.86,4.61 18.92,4.64 18.97,4.67 19.02,4.71 19.06,4.75 19.1,4.8 19.13,4.85 19.15,4.91 19.16,4.97 19.17,5.03 19.17,5.09 19.16,5.16 19.14,5.21 19.12,5.27 19.09,5.32 19.05,5.37 19.01,5.42 18.96,5.45 18.9,5.48 18.85,5.51 18.79,5.52 18.73,5.53 18.66,5.53 18.6,5.52 18.54,5.51 18.49,5.48 18.43,5.45 18.4,5.43 18.37,5.42 18.34,5.41 18.31,5.42 18.29,5.43 18.26,5.46 18.21,5.5 18.16,5.53 18.1,5.55 18.04,5.57 17.98,5.58 17.92,5.58 17.86,5.57 17.8,5.56 17.74,5.54 17.69,5.51 17.64,5.47 17.6,5.43 17.56,5.38 17.53,5.33 17.5,5.28 17.48,5.22 17.47,5.16 17.47,5.1 17.47,5.04 17.49,4.98 17.5,4.92 17.53,4.87 17.56,4.82 17.6,4.76 17.61,4.73 17.6,4.7 17.56,4.64 17.53,4.59 17.5,4.53 17.48,4.48 17.47,4.42 17.47,4.35 4.76,4.35 4.72,4.41 4.65,4.5 4.57,4.58 4.49,4.65 4.41,4.72 4.32,4.78 4.22,4.84 4.12,4.89 4.02,4.93 3.92,4.96 3.81,4.99 3.7,5 3.59,5.01 3.48,5.02 3.37,5.01 3.26,4.99 3.15,4.97 3.05,4.94 3,4.92 2.9,5.04 2.72,5.29 2.55,5.54 2.38,5.79 2.22,6.05 2.09,6.26 3.72,6.26 3.72,6.2 3.73,6.14 3.75,6.08 3.78,6.03 3.82,5.98 3.86,5.93 3.9,5.89 3.95,5.85 4.01,5.83 4.07,5.81 4.13,5.79 4.19,5.79 4.25,5.79 4.31,5.79 4.37,5.81 4.42,5.82 4.48,5.85 4.53,5.88 4.59,5.92 4.61,5.92 4.64,5.92 4.7,5.88 4.75,5.84 4.81,5.82 4.87,5.8 4.93,5.78 4.99,5.78 5.05,5.78 5.11,5.79 5.17,5.81 5.23,5.84 5.28,5.87 5.33,5.92 5.37,5.96 5.4,6.01 5.43,6.07 5.45,6.13 5.47,6.19 5.47,6.25 5.47,6.31 5.46,6.37 5.44,6.43 5.41,6.49 5.38,6.54 5.34,6.59 5.29,6.63 5.24,6.66 5.18,6.69 5.13,6.71 5.07,6.73 5,6.73 4.94,6.73 4.88,6.72 4.82,6.7 4.77,6.67 4.71,6.64 4.65,6.6 4.62,6.6 4.6,6.6 4.54,6.64 4.48,6.68 4.43,6.7 4.37,6.72 4.31,6.74 4.25,6.74 4.19,6.74 4.13,6.74 4.07,6.72 4.01,6.7 3.95,6.68 3.9,6.64 3.86,6.6 3.82,6.55 3.78,6.5 3.75,6.45 3.73,6.39 3.72,6.33 3.72,6.26 2.09,6.26 2.06,6.31 1.91,6.58 1.77,6.85 1.64,7.12 1.51,7.4 1.39,7.68 1.33,7.86 1.33,7.89 1.35,7.91 1.37,7.93 1.39,7.95 1.43,7.96 7.14,7.96 7.14,9.43 11.37,9.43 11.37,9.37 11.38,9.31 11.4,9.25 11.43,9.2 11.46,9.15 11.5,9.1 11.55,9.06 11.6,9.02 11.65,9 11.71,8.98 11.76,8.96 12.58,8.96 12.65,8.95 12.71,8.96 12.77,8.97 12.83,8.99 12.89,9.02 12.94,9.05 12.98,9.1 13.02,9.14 13.06,9.19 13.08,9.25 13.1,9.31 13.12,9.37 13.12,9.43 13.12,9.49 13.1,9.55 13.08,9.61 13.06,9.67 13.02,9.72 12.98,9.76 12.94,9.81 12.89,9.84 12.83,9.87 12.77,9.89 12.71,9.9 12.65,9.91 12.58,9.91 11.76,9.9 11.71,9.89 11.65,9.86 11.6,9.84 11.55,9.8 11.5,9.76 11.46,9.71 11.43,9.66 11.4,9.61 11.38,9.55 11.37,9.49 11.37,9.43 7.14,9.43
VDD on TOP (solid shape): 18.89,5.31 18.89,5.06 17.94,4.11 17.44,4.11 17.34,4.01 17.34,3.11 17.14,2.91 15.59,2.91 15.44,3.06 15.44,3.31 16.14,3.31 16.14,3.56 15.84,3.56 15.84,3.31 15.44,3.31 15.44,3.86 16.14,3.86 16.14,4.11 15.84,4.11 15.84,3.86 15.44,3.86 15.44,5.31 15.54,5.41 18.79,5.41
VDD on BOTTOM (solid shape): 13.09,9.61 12.69,9.21 11.69,9.21 11.59,9.31 11.59,10.81 11.84,11.06 13.09,11.06
VDD on BOTTOM (solid shape): 18.94,5.06 18.04,4.16 17.84,4.16 17.74,4.26 17.74,5.96 18.19,6.41 18.94,6.41
VDD on L2 (solid shape): 12.28,23.44 12.3,23.43 12.32,23.41 12.33,23.38 12.34,23.36 12.33,23.33 12.3,23.27 12.27,23.22 12.24,23.16 12.23,23.1 12.22,23.04 12.22,22.98 12.23,22.92 12.24,22.86 12.26,22.81 12.29,22.75 12.33,22.7 12.37,22.66 12.41,22.62 12.47,22.59 12.52,22.56 12.58,22.54 12.64,22.53 12.7,22.53 12.76,22.53 12.82,22.55 12.87,22.56 12.93,22.59 12.98,22.62 13.02,22.66 13.06,22.71 13.1,22.76 13.13,22.81 13.15,22.86 13.16,22.92 13.17,22.98 13.17,23.04 13.16,23.1 13.14,23.16 13.12,23.22 13.09,23.28 13.09,23.31 13.1,23.33 13.12,23.36 13.14,23.38 13.16,23.39 13.29,23.38 13.46,23.36 13.56,23.35 13.59,23.33 13.61,23.31 13.63,23.29 13.63,23.26 13.63,23.23 13.62,23.2 13.6,23.16 13.57,23.11 13.54,23.05 13.53,22.99 13.52,22.93 13.52,22.87 13.53,22.81 13.55,22.75 13.57,22.69 13.6,22.64 13.64,22.59 13.69,22.54 13.74,22.51 13.79,22.48 13.85,22.45 13.91,22.44 13.97,22.43 14.03,22.43 14.09,22.44 14.15,22.46 14.21,22.48 14.27,22.51 14.31,22.55 14.36,22.6 14.39,22.65 14.42,22.7 14.45,22.76 14.46,22.82 14.47,22.88 14.47,22.94 14.46,23.01 14.45,23.05 14.45,23.08 14.46,23.11 14.47,23.13 14.5,23.15 14.53,23.16 14.56,23.16 14.71,23.13 15,23.05 15.29,22.97 15.57,22.88 15.85,22.79 16.13,22.68 16.4,22.57 16.67,22.46 16.94,22.33 17.21,22.2 17.47,22.06 17.73,21.92 17.98,21.76 18.23,21.61 18.48,21.44 18.72,21.27 18.96,21.09 19.08,21 19.06,20.95 19.03,20.85 19.01,20.74 18.99,20.63 18.99,20.53 18.99,20.42 18.99,20.31 19.01,20.2 19.04,20.1 19.07,20 19.11,19.89 19.15,19.8 19.2,19.7 19.26,19.61 19.33,19.53 19.4,19.45 19.48,19.37 19.57,19.3 19.66,19.23 19.75,19.17 19.85,19.12 19.96,19.08 20.06,19.05 20.17,19.02 20.28,19 20.39,18.99 20.51,18.98 20.62,18.99 20.73,19 20.84,19.03 20.95,19.06 21,19.08 21.09,18.96 21.28,18.71 21.45,18.46 21.62,18.21 21.78,17.95 21.94,17.69 22.08,17.42 22.22,17.15 22.36,16.87 22.48,16.6 22.6,16.31 22.71,16.03 22.82,15.74 22.91,15.45 23,15.16 23.08,14.87 23.15,14.57 23.22,14.27 23.27,13.97 23.32,13.67 23.36,13.37 23.4,13.07 23.42,12.76 23.44,12.46 23.44,12.15 23.44,11.85 23.44,11.54 23.42,11.24 23.39,10.93 23.36,10.63 23.32,10.33 23.27,10.03 23.22,9.73 23.15,9.43 23.08,9.13 23,8.84 22.91,8.55 22.81,8.26 22.71,7.97 22.6,7.69 22.48,7.41 22.35,7.13 22.22,6.85 22.08,6.58 21.93,6.32 21.78,6.05 21.61,5.79 21.45,5.54 21.27,5.29 21.09,5.05 20.99,4.93 20.94,4.94 20.84,4.97 20.73,5 20.62,5.01 20.51,5.02 20.41,5.01 20.3,5 20.19,4.99 20.08,4.96 19.98,4.93 19.88,4.89 19.78,4.84 19.69,4.79 19.6,4.72 19.51,4.66 19.43,4.58 19.36,4.5 19.29,4.42 19.23,4.33 19.17,4.24 19.12,4.14 19.08,4.04 19.05,3.94 19.02,3.83 19,3.72 18.99,3.62 18.98,3.51 18.99,3.4 19,3.29 19.02,3.17 19.05,3.06 19.07,3.01 18.95,2.91 18.71,2.73 18.46,2.55 18.21,2.39 17.95,2.22 17.68,2.07 17.42,1.92 17.15,1.78 16.87,1.65 16.59,1.52 16.31,1.4 16.03,1.29 15.74,1.19 15.45,1.09 15.16,1 14.87,0.92 14.57,0.85 14.27,0.78 13.97,0.73 13.67,0.68 13.37,0.64 13.07,0.6 12.76,0.58 12.46,0.56 12.15,0.56 11.85,0.56 11.54,0.56 11.24,0.58 10.93,0.6 10.63,0.64 10.33,0.68 10.03,0.72 9.73,0.78 9.43,0.85 9.13,0.92 8.84,1 8.55,1.09 8.26,1.18 7.97,1.29 7.68,1.4 7.4,1.52 7.13,1.64 6.85,1.77 6.58,1.92 6.31,2.06 6.05,2.22 5.79,2.38 5.54,2.55 5.29,2.72 5.04,2.91 4.92,3 4.94,3.05 4.97,3.16 4.99,3.27 5.01,3.37 5.01,3.48 5.01,3.59 5,3.7 4.99,3.81 4.96,3.92 4.93,4.02 4.88,4.13 4.84,4.23 4.78,4.32 4.72,4.41 4.65,4.5 4.57,4.58 4.49,4.65 4.41,4.72 4.32,4.78 4.22,4.84 4.12,4.89 4.02,4.93 3.92,4.96 3.81,4.99 3.7,5 3.59,5.01 3.48,5.02 3.37,5.01 3.26,4.99 3.15,4.97 3.05,4.94 3,4.92 2.9,5.04 2.72,5.29 2.55,5.54 2.38,5.79 2.22,6.05 2.09,6.26 3.72,6.26 3.72,6.2 3.73,6.14 3.75,6.08 3.78,6.03 3.82,5.98 3.86,5.93 3.9,5.89 3.95,5.85 4.01,5.83 4.07,5.81 4.13,5.79 4.19,5.79 4.25,5.79 4.31,5.79 4.37,5.81 4.42,5.82 4.48,5.85 4.53,5.88 4.59,5.92 4.61,5.92 4.64,5.92 4.7,5.88 4.75,5.84 4.81,5.82 4.87,5.8 4.93,5.78 4.99,5.78 5.05,5.78 5.11,5.79 5.17,5.81 5.23,5.84 5.28,5.87 5.33,5.92 5.37,5.96 5.4,6.01 5.43,6.07 5.45,6.13 5.47,6.19 5.47,6.25 5.47,6.31 5.46,6.37 5.44,6.43 5.41,6.49 5.38,6.54 5.34,6.59 5.29,6.63 5.24,6.66 5.18,6.69 5.13,6.71 5.07,6.73 5,6.73 4.94,6.73 4.88,6.72 4.82,6.7 4.77,6.67 4.71,6.64 4.65,6.6 4.62,6.6 4.6,6.6 4.54,6.64 4.48,6.68 4.43,6.7 4.37,6.72 4.31,6.74 4.25,6.74 4.19,6.74 4.13,6.74 4.07,6.72 4.01,6.7 3.95,6.68 3.9,6.64 3.86,6.6 3.82,6.55 3.78,6.5 3.75,6.45 3.73,6.39 3.72,6.33 3.72,6.26 2.09,6.26 2.06,6.31 1.91,6.58 1.77,6.85 1.64,7.12 1.53,7.36 19.72,7.36 19.72,7.32 19.73,7.26 19.74,7.2 19.77,7.14 19.8,7.09 19.84,7.04 19.88,7 19.93,6.96 19.98,6.93 20.04,6.9 20.1,6.89 20.16,6.88 20.23,6.88 20.29,6.89 20.35,6.9 20.4,6.93 20.46,6.96 20.51,7 20.55,7.04 20.59,7.09 20.62,7.14 20.64,7.2 20.66,7.26 20.67,7.32 20.67,7.39 20.66,7.45 20.64,7.51 20.62,7.57 20.59,7.62 20.55,7.67 20.51,7.71 20.46,7.75 20.4,7.78 20.35,7.81 20.29,7.82 20.23,7.83 20.16,7.83 20.1,7.82 20.04,7.81 19.98,7.78 19.93,7.75 19.88,7.71 19.84,7.67 19.8,7.62 19.77,7.57 19.74,7.51 19.73,7.45 19.72,7.39 19.72,7.36 1.53,7.36 1.51,7.4 1.39,7.68 1.33,7.86 1.33,7.89 1.35,7.91 1.37,7.93 1.39,7.95 1.43,7.96 7.14,7.96 7.14,9.11 12.82,9.11 12.82,9.05 12.82,8.99 12.84,8.93 12.86,8.87 12.89,8.81 12.92,8.76 12.96,8.71 13.01,8.67 13.06,8.64 13.12,8.61 13.18,8.59 13.24,8.58 13.3,8.58 13.37,8.58 13.43,8.6 13.49,8.62 13.54,8.65 13.59,8.68 13.62,8.71 14.14,8.71 14.16,8.69 14.22,8.66 14.28,8.64 14.34,8.63 14.4,8.63 14.47,8.63 14.53,8.65 14.58,8.67 14.64,8.7 14.69,8.73 14.74,8.78 14.78,8.82 14.81,8.88 14.84,8.93 14.86,8.99 14.87,9.05 14.87,9.11 14.86,9.18 14.85,9.24 14.83,9.3 14.8,9.35 14.77,9.4 14.72,9.45 14.68,9.49 14.62,9.52 14.57,9.55 14.51,9.57 14.45,9.58 14.4,9.58 14.37,9.59 14.35,9.61 14.33,9.63 14.32,9.66 14.32,9.71 14.31,9.77 14.29,9.82 14.26,9.88 14.23,9.93 14.19,9.98 14.15,10.02 14.1,10.05 14.05,10.08 13.99,10.11 13.93,10.12 13.87,10.13 13.81,10.13 13.75,10.12 13.7,10.11 13.64,10.08 13.59,10.05 13.54,10.02 13.49,9.98 13.46,9.93 13.42,9.88 13.4,9.82 13.38,9.77 13.37,9.71 13.37,9.66 13.36,9.63 13.34,9.61 13.32,9.59 13.29,9.58 13.24,9.58 13.18,9.57 13.12,9.55 13.06,9.52 13.01,9.49 12.96,9.45 12.92,9.4 12.89,9.35 12.86,9.29 12.84,9.23 12.82,9.17 12.82,9.11 7.14,9.11 7.14,22.38 7.28,22.44 7.54,22.56 7.81,22.67 8.09,22.77 8.36,22.86 8.64,22.95 8.92,23.04 9.2,23.11 9.49,23.18 9.77,23.24 10.06,23.29 10.35,23.34 10.64,23.38 10.83,23.39 10.85,23.38 10.87,23.36 10.89,23.33 10.89,23.31 10.9,23.28 10.87,23.21 10.84,23.16 10.83,23.1 10.82,23.04 10.82,22.97 10.83,22.91 10.84,22.85 10.87,22.79 10.9,22.74 10.94,22.69 10.98,22.65 11.03,22.61 11.08,22.58 11.14,22.55 11.2,22.54 11.26,22.53 11.32,22.53 11.39,22.54 11.45,22.55 11.5,22.58 11.56,22.61 11.61,22.65 11.65,22.69 11.69,22.74 11.72,22.79 11.74,22.85 11.76,22.91 11.77,22.97 11.77,23.03 11.76,23.1 11.75,23.16 11.72,23.21 11.69,23.27 11.66,23.33 11.65,23.36 11.66,23.38 11.67,23.41 11.69,23.43 11.71,23.44 11.87,23.45 12.12,23.45
N06288 on BOTTOM (solid shape): 17.59,3.71 17.59,2.96 17.37,2.73 17.35,2.73 17.01,2.59 16.87,2.25 16.87,2.23 16.59,1.96 15.24,1.96 15.24,3.21 16.89,3.21 16.99,3.31 16.99,3.81 17.49,3.81
GND_SIGNAL on BOTTOM (solid shape): 14.74,1.26 14.74,0.84 11.99,0.51 9.24,0.84 9.24,1.26 9.39,1.41 14.59,1.41

Small or netless copper shapes (teardrops, artwork), in the pictures only: 22 on TOP, 20 on BOTTOM

## Text on the board
Ref Des/Silkscreen Bottom: U3 | G | SC1 | U2 | 10 | 9 | 2 | 1
Ref Des/Silkscreen Top: G | U4 | RES | DIO | CLK | BAT | VDD | TM | DM
User.5: TP7 | U3 | U2 | CN1 | R4 | D2 | R1 | C4 | R6 | R7 | C7 | L1 | C11 | C3 | R3 | R2 | C8 | C2 | SC1 | D1 | C1 | C5 | C14 | C6
User.6: TP2 | R8 | U1 | U4 | C10 | R9 | TP1 | C9 | LED1 | R5 | TP6 | TP4 | TP5 | TP3 | C13 | C12 | SW1
User.11: G | U4 | RES | DIO | CLK | BAT | VDD | TM | DM
User.12: U3 | G | SC1 | U2 | 10 | 9 | 2 | 1
User.14: FIGURE | SIZE | 0.2 | DRILL CHART: TOP to BOTTOM | ALL UNITS ARE IN MILLIMETERS | PLATED | QTY | 73
